# EAGLE board PiGateway2 (EAGLE 7.6.0)

Size 65 x 56 mm. Coordinates in mm from the lower left corner, seen from the top.
Outline: 0,3 arc90 3,0 62,0 arc90 65,3 65,53 arc90 62,56 3,56 arc90 0,53 0,3
Copper layers (1*16): Top 0.035mm / dielectric 1.5mm / Bottom 0.035mm
Design rules "default": minimum track width 10mil, minimum drill 24mil, track to track 8mil, track to pad 8mil, pad to pad 8mil, via to via 8mil, smd to smd 8mil, copper to edge 40mil, drill to drill 8mil, minimum pad ring 10mil, minimum via ring 8mil, stop-mask expansion 4mil, vias tented up to drill 0mil, thermal gap 10mil
Holes 2.75 mm at 3.5,52.5 3.5,3.5 61.5,52.5 61.5,3.5

## Footprints (pad centres in the part's own frame; a part is rotated, then mirrored left to right if it is on the bottom)
C0402 = smd 0.7 x 0.9: 1 -0.65,0; 2 0.65,0
C1206 = smd 1.6 x 1.8: 1 -1.4,0; 2 1.4,0
QFN32 = smd 0.6 x 0.3: 1 -2.3,1.75; 2 -2.3,1.25; 3 -2.3,0.75; 4 -2.3,0.25; 5 -2.3,-0.25; 6 -2.3,-0.75; 7 -2.3,-1.25; 8 -2.3,-1.75; 17 2.3,-1.75; 18 2.3,-1.25; 19 2.3,-0.75; 20 2.3,-0.25; 21 2.3,0.25; 22 2.3,0.75; 23 2.3,1.25; 24 2.3,1.75 | smd 0.3 x 0.6: 9 -1.75,-2.3; 10 -1.25,-2.3; 11 -0.75,-2.3; 12 -0.25,-2.3; 13 0.25,-2.3; 14 0.75,-2.3; 15 1.25,-2.3; 16 1.75,-2.3; 25 1.75,2.3; 26 1.25,2.3; 27 0.75,2.3; 28 0.25,2.3; 29 -0.25,2.3; 30 -0.75,2.3; 31 -1.25,2.3; 32 -1.75,2.3 | smd 3.2 x 3.2: EXP 0,0
2X20 = drill 1.016 octagon: 1 -24.13,-1.27; 2 -24.13,1.27; 3 -21.59,-1.27; 4 -21.59,1.27; 5 -19.05,-1.27; 6 -19.05,1.27; 7 -16.51,-1.27; 8 -16.51,1.27; 9 -13.97,-1.27; 10 -13.97,1.27; 11 -11.43,-1.27; 12 -11.43,1.27; 13 -8.89,-1.27; 14 -8.89,1.27; 15 -6.35,-1.27; 16 -6.35,1.27; 17 -3.81,-1.27; 18 -3.81,1.27; 19 -1.27,-1.27; 20 -1.27,1.27; 21 1.27,-1.27; 22 1.27,1.27; 23 3.81,-1.27; 24 3.81,1.27; 25 6.35,-1.27; 26 6.35,1.27; 27 8.89,-1.27; 28 8.89,1.27; 29 11.43,-1.27; 30 11.43,1.27; 31 13.97,-1.27; 32 13.97,1.27; 33 16.51,-1.27; 34 16.51,1.27; 35 19.05,-1.27; 36 19.05,1.27; 37 21.59,-1.27; 38 21.59,1.27; 39 24.13,-1.27; 40 24.13,1.27
2X04 = drill 1.016 octagon: 1 -3.81,-1.27; 2 -3.81,1.27; 3 -1.27,-1.27; 4 -1.27,1.27; 5 1.27,-1.27; 6 1.27,1.27; 7 3.81,-1.27; 8 3.81,1.27
R0402 = smd 0.7 x 0.9: 1 -0.65,0; 2 0.65,0
ML620Q504 = smd 0.35 x 0.95: 1 -2.75,-4.125; 2 -2.25,-4.125; 3 -1.75,-4.125; 4 -1.25,-4.125; 5 -0.75,-4.125; 6 -0.25,-4.125; 7 0.25,-4.125; 8 0.75,-4.125; 9 1.25,-4.125; 10 1.75,-4.125; 11 2.25,-4.125; 12 2.75,-4.125; 25 2.75,4.125; 26 2.25,4.125; 27 1.75,4.125; 28 1.25,4.125; 29 0.75,4.125; 30 0.25,4.125; 31 -0.25,4.125; 32 -0.75,4.125; 33 -1.25,4.125; 34 -1.75,4.125; 35 -2.25,4.125; 36 -2.75,4.125 | smd 0.95 x 0.35: 13 4.125,-2.75; 14 4.125,-2.25; 15 4.125,-1.75; 16 4.125,-1.25; 17 4.125,-0.75; 18 4.125,-0.25; 19 4.125,0.25; 20 4.125,0.75; 21 4.125,1.25; 22 4.125,1.75; 23 4.125,2.25; 24 4.125,2.75; 37 -4.125,2.75; 38 -4.125,2.25; 39 -4.125,1.75; 40 -4.125,1.25; 41 -4.125,0.75; 42 -4.125,0.25; 43 -4.125,-0.25; 44 -4.125,-0.75; 45 -4.125,-1.25; 46 -4.125,-1.75; 47 -4.125,-2.25; 48 -4.125,-2.75
TSST8 = smd 0.52 x 0.44: P1 -0.975,-0.73; P2 -0.325,-0.73; P3 0.325,-0.73; P4 0.975,-0.73; P5 0.975,0.73; P6 0.325,0.73; P7 -0.325,0.73; P8 -0.975,0.73
UQFN10 = smd 0.3 x 0.58: 1 -0.75,-0.635; 2 -0.25,-0.635; 3 0.25,-0.635; 4 0.75,-0.635; 6 0.75,0.635; 7 0.25,0.635; 8 -0.25,0.635; 9 -0.75,0.635 | smd 0.63 x 0.35: 5 0.86,0; 10 -0.86,0
BP3596A = smd 0.23 x 0.66: 1 1.8,-1.355; 2 1.4,-1.355; 3 1,-1.355; 4 0.6,-1.355; 5 0.2,-1.355; 6 -0.2,-1.355; 7 -0.6,-1.355; 8 -1,-1.355; 9 -1.4,-1.355; 10 -1.8,-1.355; 11 -1.8,1.355; 12 -1.4,1.355; 13 -1,1.355; 14 -0.6,1.355; 15 -0.2,1.355; 16 0.2,1.355; 17 0.6,1.355; 18 1,1.355; 19 1.4,1.355; 20 1.8,1.355 | drill 2.2 pad 3.81: GND1 6.55,-0.25; GND2 -6.55,-0.25 | smd 0.35 x 0.66: NC1 2.275,-1.355; NC2 -2.275,-1.355; NC3 -2.275,1.355; NC4 2.275,1.355
SML-E1X = smd 0.8 x 0.8: A 0,-0.825; C 0,0.825
SKHUALE010 = smd 2.75 x 1.4: 1 -3.375,2; 2 3.375,2; 3 -3.375,-2; 4 3.375,-2
ZX62R-B-5P = smd 1.35 x 0.4: 1 2.675,-1.3; 2 2.675,-0.65; 3 2.675,0; 4 2.675,0.65; 5 2.675,1.3 | smd 1.9 x 1.6: M1 0,-4.1; M2 0,4.1 | smd 2 x 2.1: M3 2.35,3.1; M4 2.35,-3.1

## Placement (x,y rotation side)
C1  0.1u  [C0402]  19.05,16.51 180 bottom
C2  1u  [C0402]  15.24,12.7 180 bottom
C3  33000p  [C0402]  20.32,2.54 270 bottom
C4  2.2u  [C0402]  21.59,2.54 270 bottom
C5  2.2u  [C0402]  22.86,2.54 90 bottom
C16  22u  [C1206]  5.71,41.27 90 top
C19  0.1u  [C0402]  13.97,41.91 0 top
C20  0.1u  [C0402]  12.7,31.75 180 top
C21  47p  [C0402]  8.89,36.83 90 top
C22  47p  [C0402]  8.89,33.02 270 top
C24  0.1u  [C0402]  19.05,19.05 0 bottom
C26  0.1u  [C0402]  9.53,41.27 90 top
IC1  FT232RQ  [QFN32]  13.97,36.83 270 top
JP2  [2X20]  32.5,52.5 0 top
JP3  [2X04]  24.88,26.5 0 top
R1  510  [R0402]  15.24,3.81 0 bottom
R4  10K  [R0402]  24.13,16.51 180 bottom
R5  510  [R0402]  19.05,17.78 0 bottom
R6  510  [R0402]  19.05,20.32 0 bottom
R7  1K  [R0402]  15.24,7.62 0 bottom
R8  1K  [R0402]  15.24,8.89 0 bottom
R9  10K  [R0402]  15.24,10.16 180 bottom
R10  10K  [R0402]  15.24,11.43 0 bottom
R11  1K  [R0402]  58.42,41.27 90 top
R12  1K  [R0402]  55.88,41.27 90 top
R13  1K  [R0402]  5.08,27.3 270 top
R16  10K  [R0402]  53.34,41.27 270 top
R17  10K  [R0402]  50.8,41.27 270 top
R18  10K  [R0402]  60.96,41.27 270 top
R19  10K  [R0402]  45.72,46.35 270 top
R20  0  [R0402]  45.72,41.27 90 top
R21  NC  [R0402]  48.26,41.27 90 top
R22  10K  [R0402]  48.26,46.35 270 top
U$1  ML620Q504  [ML620Q504]  25.4,10.16 90 bottom
U$2  RT1A060AP  [TSST8]  5.08,46.99 0 top
U$3  TI-TS5A23159  [UQFN10]  22.86,19.05 270 bottom
U$4  DF40C-20DP-0.4V(51)  [BP3596A]  34.29,11.43 90 top
U$5  SML-E13BC8T  [SML-E1X]  55.88,45.72 0 top
U$6  SML-E12Y8W  [SML-E1X]  58.42,45.72 0 top
U$7  SKHUALE010  [SKHUALE010]  11.43,26.67 0 top
U$11  ZX62R-B-5P  [ZX62R-B-5P]  1.27,34.29 0 top
U$16  SML-E12U8WT86  [SML-E1X]  2.54,26.67 0 top

## Library data of the parts
C1-C5 C16 C19-C22 C24 C26 R1 R4-R13 R16-R22 = rcl
IC1 = ftdichip; MPN: FT232RQ; OC_FARNELL: 1146033; OC_NEWARK: 91K9919
JP2 JP3 = pinhead
U$1 U$4-U$7 U$16 = lazurite
U$2 U$3 = lz-shield
U$11 = con-hirose

## Nets
+3V3: JP2.1 JP2.17 R11.1 R12.1 R16.1 R17.1 R18.1 R19.1 R22.1 U$4.8 U$4.9
+5V: JP2.2 JP2.4 U$2.P1 U$2.P2 U$2.P3 U$2.P6 U$2.P8
+5V/1: C1.1 C2.1 C5.1 C16.1 C19.1 C20.1 C24.1 C26.1 IC1.1 IC1.19 JP3.1 R9.1 R10.1 R13.2 U$1.12 U$1.13 U$1.44 U$2.P5 U$3.8 U$11.1
AVDD_MON: U$4.7
BOOT_WRITE: IC1.11 R4.1 U$3.1 U$3.5
DM: C22.1 IC1.15 U$11.2
DP: C21.1 IC1.14 U$11.3
EEP_WP: U$4.18
GND: C1.2 C2.2 C3.2 C4.2 C5.2 C16.2 C19.2 C20.2 C21.2 C22.2 C24.2 C26.2 IC1.4 IC1.17 IC1.20 IC1.24 IC1.26 JP2.6 JP2.9 JP2.14 JP2.20 JP2.25 JP2.30 JP2.34 JP2.39 JP3.8 R4.2 U$1.14 U$1.45 U$3.3 U$4.3 U$4.4 U$4.5 U$4.6 U$4.17 U$4.GND1 U$7.3 U$7.4 U$11.4 U$11.5 U$11.M1 U$11.M2 U$11.M3 U$11.M4
I2C_SCL: JP2.5 R17.2 U$4.1
I2C_SDA: JP2.3 R16.2 U$4.2
LED_RX: JP2.33 U$6.C
LED_TX: JP2.31 U$5.C
M2P: JP2.7
MISO: JP2.21 U$4.12
MOSI: JP2.19 U$4.16
N$1: JP2.15
N$2: R1.2
N$3: C3.1 U$1.46
N$4: IC1.32 U$3.2
N$5: IC1.31 U$3.4
N$6: IC1.30 R7.2
N$7: C4.1 U$1.43
N$8: R13.1 U$16.A
N$9: JP2.27
N$10: JP2.29
N$11: JP2.35
N$12: JP2.37
N$13: JP2.40
N$14: IC1.2 R8.2
N$15: JP2.38
N$16: JP2.36
N$17: JP2.32
N$18: IC1.22 R6.2
N$19: IC1.21 R5.2
N$20: JP2.28
N$21: JP2.22
N$28: R1.1 U$2.P4
N$29: JP2.18
N$30: JP2.16
N$34: JP2.10
N$36: U$4.GND2
N$37: R11.2 U$6.A
N$38: R12.2 U$5.A
P2M: JP2.8
P03: U$1.22
P04: U$1.23
P05: U$1.24
P20: U$1.15
P21: U$1.16
P22: U$1.17
P23: U$1.18 U$16.C
P30: R7.1 U$1.4
P31: R8.1 U$1.5
P32: U$1.6
P33: U$1.7
P34: JP3.5 R9.2 U$1.8
P35: JP3.6 R10.2 U$1.9
P36: JP3.4 U$1.10
P37: U$1.11
P42: U$1.27
P43: U$1.28
P44: JP3.2 U$1.29
P45: JP3.3 U$1.30
P46: U$1.31
P50: U$1.33 U$7.1 U$7.2
P51: U$1.34
P52: U$1.35
P53: JP3.7 U$1.36
P56: U$1.39
P57: U$1.40
RESETN: U$1.1
RF_CSB: R20.1 R21.1 U$4.15
RF_CSB0: JP2.24 R19.2 R20.2
RF_CSB1: JP2.26 R21.2 R22.2
RF_IRQ: JP2.12 U$4.13
RF_REGPDIN: JP2.11 U$4.10
RF_RSTB: JP2.13 R18.2 U$4.11
SCLK: JP2.23 U$4.14
TEST0: U$1.41 U$3.10
TEST1N: U$1.42 U$3.6
U_TEST0: R6.1 U$3.9
U_TEST1N: R5.1 U$3.7

## Tracks (layer width: path | path; a pad name or v marks a point on that pad's centre or on a via)
+3V3  (10 unrouted)
+5V  (6 unrouted)
+5V/1  (19 unrouted)
BOOT_WRITE  (3 unrouted)
DM  (2 unrouted)
DP  (2 unrouted)
GND  (43 unrouted)
I2C_SCL  (2 unrouted)
I2C_SDA  (2 unrouted)
LED_RX  (1 unrouted)
LED_TX  (1 unrouted)
MISO  (1 unrouted)
MOSI  (1 unrouted)
N$3  (1 unrouted)
N$4  (1 unrouted)
N$5  (1 unrouted)
N$6  (1 unrouted)
N$7  (1 unrouted)
N$8  (1 unrouted)
N$14  (1 unrouted)
N$18  (1 unrouted)
N$19  (1 unrouted)
N$28  (1 unrouted)
N$37  (1 unrouted)
N$38  (1 unrouted)
P23  (1 unrouted)
P30  (1 unrouted)
P31  (1 unrouted)
P34  (2 unrouted)
P35  (2 unrouted)
P36  (1 unrouted)
P44  (1 unrouted)
P45  (1 unrouted)
P50  (2 unrouted)
P53  (1 unrouted)
RF_CSB  (2 unrouted)
RF_CSB0  (2 unrouted)
RF_CSB1  (2 unrouted)
RF_IRQ  (1 unrouted)
RF_REGPDIN  (1 unrouted)
RF_RSTB  (2 unrouted)
SCLK  (1 unrouted)
TEST0  (1 unrouted)
TEST1N  (1 unrouted)
U_TEST0  (1 unrouted)
U_TEST1N  (1 unrouted)

## Text on the board
Document: Bootが書き込めない / RPi電源ON/USB oFFが考慮されていない